# Altium PCB PCB3.PcbDoc
Units mil, origin at the board's own origin, x right, y up, seen from the top; angles counter-clockwise.
Board outline 10815 x 4595 mil, 2 copper layers (Top Layer, Bottom Layer); 72 components, 24 nets, 165 pads, 8 vias.
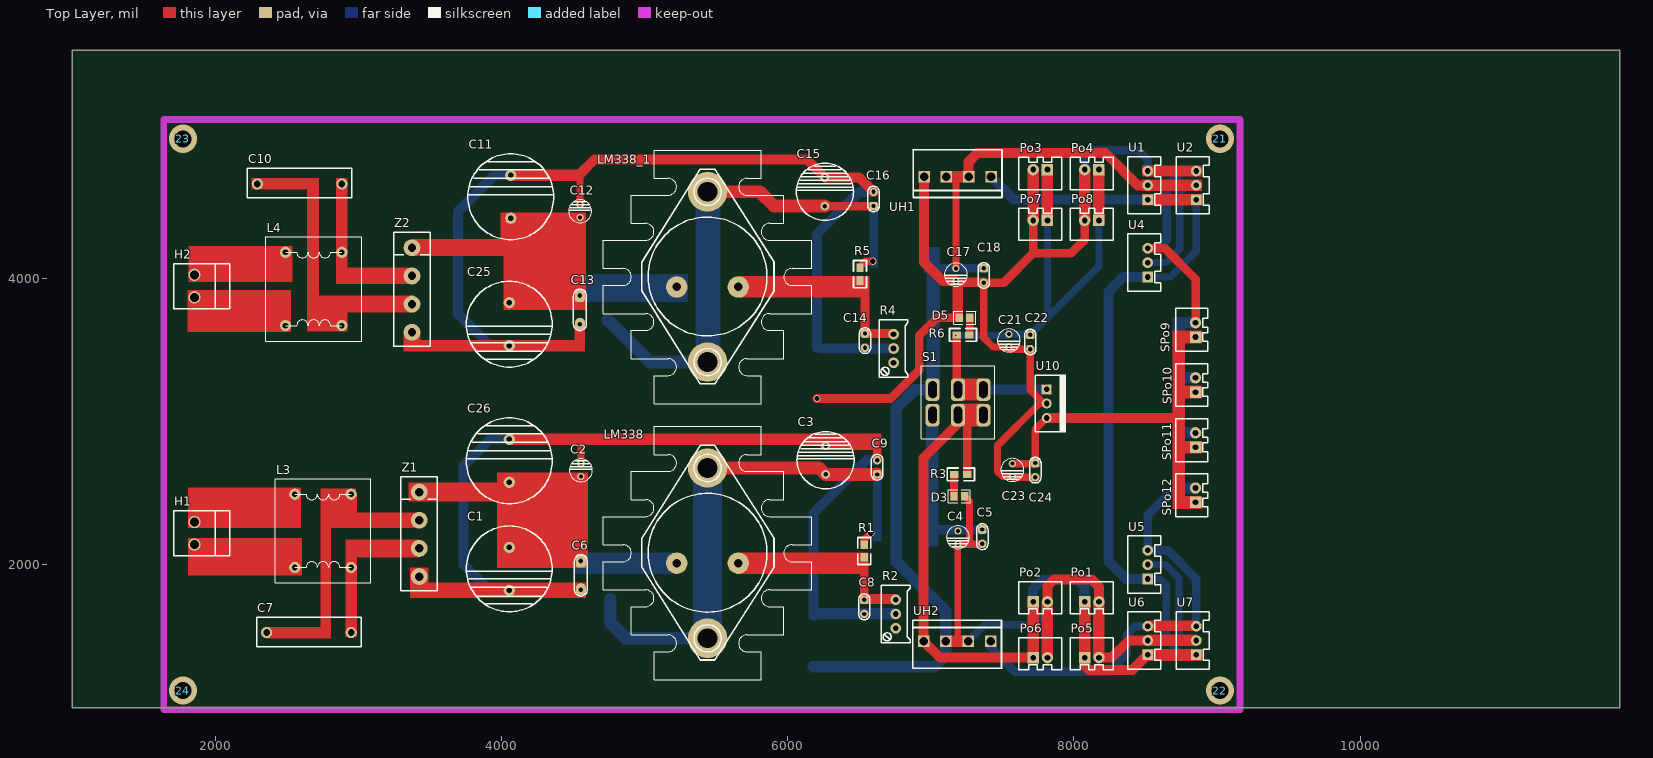
[diagram p0: Top Layer view]
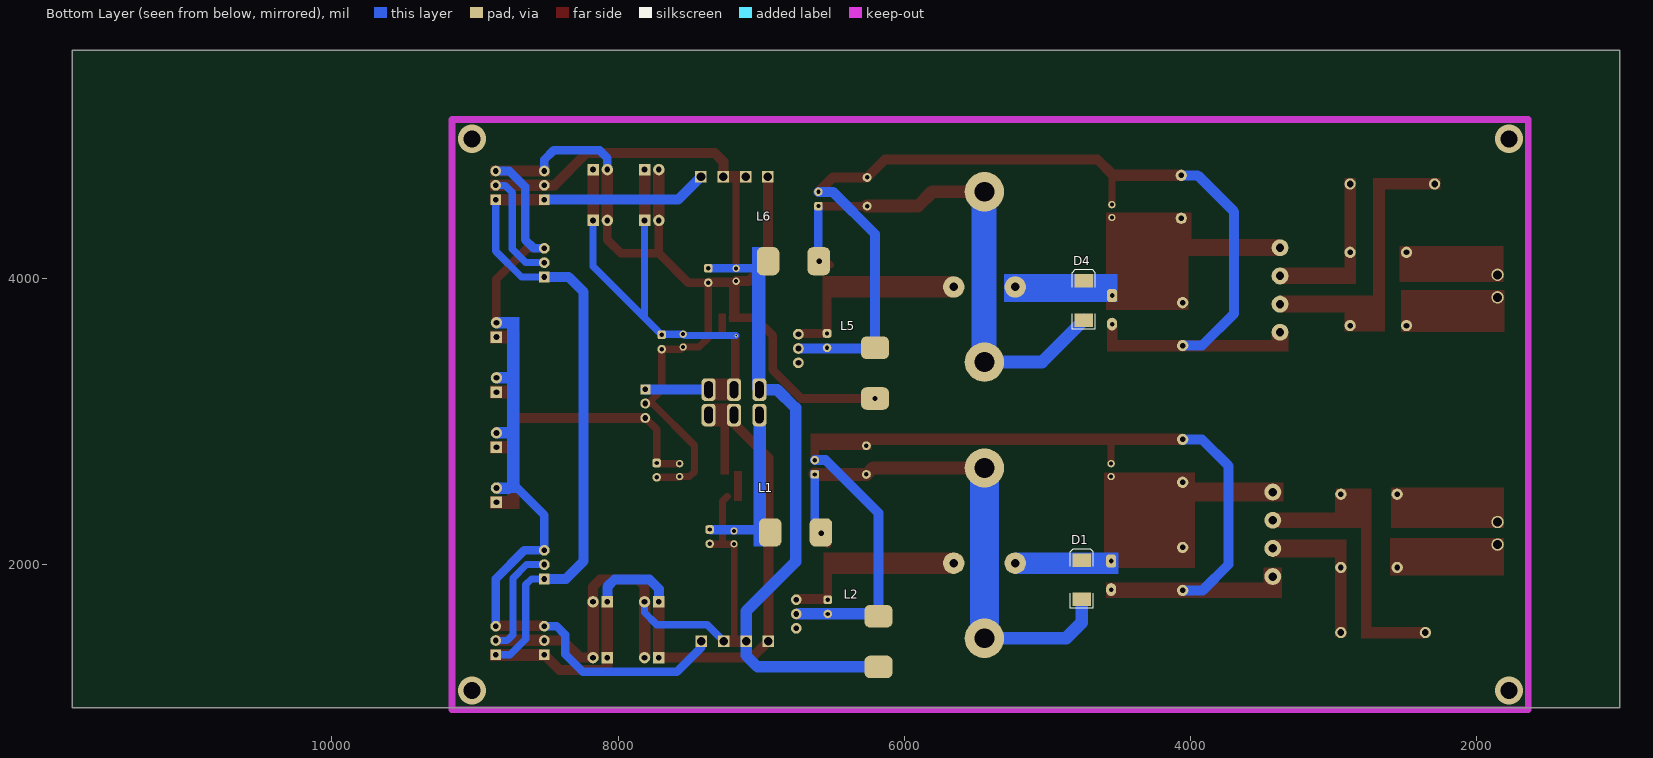
[diagram p1: Bottom Layer view, seen from below]

## Layer stack, top to bottom
Top Solder: solder mask 0.4, Solder Resist, Dk 3.5
Top Layer: signal copper 1.4
Dielectric 1: dielectric 12.6, FR-4, Dk 4.8
Bottom Layer: signal copper 1.4
Bottom Solder: solder mask 0.4, Solder Resist, Dk 3.5

## Board outline
1000,1000 11815,1000 11815,5595 1000,5595

## Design rules (kind name [scope] priority, off if disabled: settings)
Clearance [All] p1: gap=10
HoleSize [All] p1: absolutevalues=TRUE maxlimit=150 minlimit=1 maxpercent=80.000 minpercent=20.000
PolygonConnect [All] p1: connectstyle=Relief reliefconductorwidth=10 reliefentries=4 polygonreliefangle="90 Angle" airgapwidth=10
RoutingVias [All] p1: holewidth=28 width=50 viastyle="Through Hole" minholewidth=28 minwidth=50 maxholewidth=28 maxwidth=50
SolderMaskExpansion [All] p1: expansion=4
Width [All] p1: maxlimit=100 minlimit=10 preferedwidth=10
29 further rules are at their usual default settings.

## Components (designator, comment, footprint, x,y, rotation, side; value= is the part's Value field where it differs from the comment)
21 "螺丝孔" 固定过孔 9020,4975 r0 top
22 "螺丝孔" 固定过孔 9020,1120 r0 top
23 "螺丝孔" 固定过孔 1775,4975 r0 top
24 "螺丝孔" 固定过孔 1775,1120 r0 top
C1 "4700uF" CD-7.6mm 4055,2120 r90 top
C2 "Cap" CD-2.2mm 4555,2615 r270 top
C3 "470uF" CD-5mm 6265,2630 r270 top
C4 "22uF" CD-2.2mm 7190,2235 r90 top
C5 "10uF" 陶瓷电容 7360,2245 r90 top
C6 "0.1uF" 独石电容 4555,2025 r180 top
C7 "0.1uF" 安规电容 2359.45,1525 r270 top
C8 "Cap" 陶瓷电容 6535,1755 r90 top
C9 "Cap" 陶瓷电容 6625,2630 r270 top
C10 "Cap1" 安规电容 2294.45,4660 r270 top
C11 "4700uf" CD-7.6mm 4065,4420 r270 top
C12 "22uf" CD-2.2mm 4550,4425 r270 top
C13 "0.1uf" 独石电容 4548.29,3880 r180 top
C14 "Cap" 陶瓷电容 6540,3615 r90 top
C15 "470uf" CD-5mm 6260,4505 r270 top
C16 "0.1uf" 陶瓷电容 6600,4505 r270 top
C17 "22uf" CD-2.2mm 7175,4070 r90 top
C18 "10uf" 陶瓷电容 7370,4070 r90 top
C21 "22uf" CD-2.2mm 7545,3610 r90 top
C22 "Cap" 陶瓷电容 7695,3605 r90 top
C23 "22uf" CD-2.2mm 7570,2705 r90 top
C24 "Cap" 陶瓷电容 7730,2710 r90 top
C25 "4700uf" CD-7.6mm 4055,3830 r90 top
C26 "4700uf" CD-7.6mm 4055,2575 r270 top
D1 "Diode 1N4004" SMC 4760,1893.19 r90 bottom
D3 "LED" 0805_s 7220,2490 r0 top
D4 "1N4002" SMC 4745,3845 r90 bottom
D5 "LED" 0805_s 7215,3710 r180 top
H1 "HT3.96-2P" HT39.6-2P-S 1855,2140 r180 top
H2 "HT3.96-2P" HT39.6-2P-S 1855,3867.52 r180 top
L1 "Inductor Iron" "功率电感-12x12 - duplicate" 6760,2225 r0 bottom
L2 "Inductor Iron" "功率电感-12x12 - duplicate" 6180,1462.17 r270 bottom
L3 "扼流线圈" 扼流线圈 2556.3,2491.81 r0 top
L4 "扼流线圈" 扼流线圈 2491.3,4181.81 r0 top
L5 "SMD" "功率电感-12x12 - duplicate" 6205,3337.83 r270 bottom
L6 "SMD" "功率电感-12x12 - duplicate" 6775,4120 r0 bottom
LM338 "D1" LM338 5655,2010 r270 top
LM338_1 "" LM338 5655,3940 r270 top
Po1 "Power_2Port" Power_S_2Port 8075,1740 r0 top
Po2 "Power_2Port" Power_S_2Port 7715,1740 r0 top
Po3 "Power_2Port" Power_S_2Port 7815,4760 r180 top
Po4 "Power_2Port" Power_S_2Port 8175,4760 r180 top
Po5 "Power_2Port" Power_S_2Port 8075,1350 r0 top
Po6 "Power_2Port" Power_S_2Port 7715,1350 r0 top
Po7 "Power_2Port" Power_S_2Port 7815,4405 r180 top
Po8 "Power_2Port" Power_S_2Port 8175,4405 r180 top
R1 "Res2" 0805 6535,2050 r90 top
R2 "可调电位器1" 电位器 6755,1555 r90 top
R3 "1k" 0805 7165,2630 r0 top
R4 "可调电位器1" 电位器 6740,3410 r90 top
R5 "RES" 0805 6505,3985 r90 top
R6 "RES" 0805 7270,3605 r180 top
S1 "双掷开关" SWITCH 7367.17,3045 r180 top
SPo9 "Power_2Port" Power_S_2Port 8850,3590 r90 top
SPo10 "Power_2Port" Power_S_2Port 8850,3205 r90 top
SPo11 "Power_2Port" Power_S_2Port 8850,2820 r90 top
SPo12 "Power_2Port" Power_S_2Port 8850,2435 r90 top
U1 "XH2.54-3p" XH2.54-3p 8515,4550 r90 top
U2 "XH2.54-3p" XH2.54-3p 8855,4550 r90 top
U4 "XH2.54-3p" XH2.54-3p 8515,4010 r90 top
U5 "XH2.54-3p" XH2.54-3p 8515,1900 r90 top
U6 "XH2.54-3p" XH2.54-3p 8515,1370 r90 top
U7 "XH2.54-3p" XH2.54-3p 8855,1370 r90 top
U10 "LM2940" TO-220 7810,3225 r270 top
UH1 "VH3.96-4A" VH3.96-4P 7497.68,4564.33 r180 top
UH2 "VH3.96-4A" VH3.96-4P 6873.03,1610.67 r0 top
Z1 "整流桥" 整流桥 3425,2506.85 r0 top
Z2 "整流桥" 整流桥 3375,4213.7 r0 top

## Footprints (in the part's own frame and the unit in brackets; to place one, negate y for a bottom-side part, rotate by r counter-clockwise, add the part's x,y. Pads: shape width x height; smd on the part's side, far side on the other; paste and mask are expansions set on the pad)
0805 [mil]
  rect 60x50 smd: 1(0,0) 2(90,0)
  silkscreen extent -50,-45 140,45
0805_s [mm]
  rect 1.3x1.499 smd: 1(0.425,-0.35) 2(-1.475,-0.35)
  silkscreen extent -2.47,-1.49 1.43,0.79
CD-2.2mm [mm]
  round 1.3 hole 0.7: 1(0,0) 2(-2.286,0)
  silkscreen extent -3.16,-2.04 0.92,2.04
CD-5mm [mil]
  round 62 hole 31.5: 1(0,0) 2(-200,0)
  silkscreen extent -300,-200 100,200
CD-7.6mm [mm]
  round 2 hole 1: 1(0,0) 2(-7.62,0)
  silkscreen extent -11.43,-7.62 3.81,7.62
HT39.6-2P-S [mm]
  round 2.2 hole 1.6: 1(0,0) 2(0,-4)
  silkscreen extent -6.3,-6 3.7,2
LM338 [mm]
  round 3.81 hole 1.5: 1(0,0) 2(0,-10.922)
  round 7 hole 3.5: 3(-16.891,-5.461) 3(13.335,-5.461)
  silkscreen extent -24.28,-23.96 20.72,13.04, body extent -21.25,-18.03 17.55,6.97, height 8.8
Power_S_2Port [mil]
  rect 80x80 hole 40: 1(0,0)
  round 80 hole 40: 2(100,0)
  silkscreen extent -100,-85 200,140
SMC [mm] "DO-214-AB/SMC; 2 C-Bend Leads; Body 7.9 x 5.9 mm, inc. leads (LxW)"
  rect 2.4x3.3 smd: 1(-3.475,0) 2(3.475,0)
  silkscreen extent -5.07,-2.05 5.43,2.05
SWITCH [mm]
  rrect50% 2.5x4 hole 1.5 slot 3 at 90 deg: 1(0,0) 2(4.5,0) 3(9,0) 4(9,-4.5) 5(4.5,-4.5) 6(0,-4.5)
  silkscreen extent -2,-8.75 11,4.25, body extent -1.85,-8.18 10.85,3.63, height 30.58
TO-220 [mil]
  rect 70x70 hole 40: 1(0,0)
  round 70 hole 40: 2(100,0) 3(200,0)
  silkscreen extent -102,-80 302,135
VH3.96-4P [mil]
  rect 80x80 hole 60: 1(76.77,-145.67) 2(232.68,-145.67) 3(388.58,-145.67) 4(544.49,-145.67)
  silkscreen extent 0,-335 625,0
XH2.54-3p [mil]
  rect 75x75 hole 40: 1(0,0)
  round 75 hole 40: 2(100,0) 3(200,0)
  silkscreen extent -100,-90 300,140
"功率电感-12x12 - duplicate" [mm]
  rrect50% 4x5 smd: 1(-4.5,0) 2(4.5,0)
  body extent -6.08,-6.15 6.21,6.15, height 8
固定过孔 [mil]
安规电容 [mm]
  round 2 hole 1.2: 1(0,0) 2(0,15)
  silkscreen extent -2.75,-1.75 2.5,16.75, body extent -2.75,-1.75 2.6,16.75, height 13
扼流线圈 [mm]
  round 2 hole 1: 1(0,0) 2(10,0) 3(10,-13) 4(0,-13)
  silkscreen extent -3.5,-15.75 13.5,2.75
整流桥 [mm]
  round 3 hole 1.5: 1(0,0) 2(0,-5) 3(0,-10) 4(0,-15)
  silkscreen extent -3.25,-17.5 3.25,2.75
独石电容 [mil]
  rrect50% 70x90 hole 32: 1(0,0)
  oval 70x90 hole 32: 2(0,200)
  silkscreen extent -45,-45 45,245, body extent -77,-18 73,218, height 335
电位器 [mil]
  round 75 hole 40: 1(0,0) 2(100,0) 3(200,0)
  silkscreen extent -100,-100 300,100
陶瓷电容 [mil]
  rrect50% 60x60 hole 30: 1(0,0)
  round 60 hole 30: 2(-100,0)
  silkscreen extent -140,-40 40,40, body extent -158,-49 59,49, height 217

## Part data
C1 C3 C4 C5 C6 C7 C11 C12 C13 C15 C16 C17 C18 C21 C23 C25 C26: library part Cap
C8 C9 C22 C24: library part Cap_1
D1: "1 Amp General Purpose Rectifier"
D4: library part Diode, "Default Diode"
L1 L2: "Magnetic-Core Inductor"
L5 L6: library part 功率电感
LM338 LM338_1: library part LM338
R1: "Resistor"
R3: library part RES, "1K"

## Via types
v1: diameter 196.85, hole 118.11, Top Layer to Bottom Layer, 4 vias
v2: diameter 50, hole 38, Top Layer to Bottom Layer, 3 vias
v3: diameter 24, hole 12, Top Layer to Bottom Layer, 1 vias

## Nets (pads, with @x,y where several pads share a name; then routed paths per layer and width w, separated by ;. In a path a pad name is that pad's centre, name@x,y a point inside that pad or via, vN(x,y) a via of type N, cw(c..) or ccw(c..) an arc to the next point about the centre after c; other vN are vias at no path point)
NetC1_1: C1.1 C2.1 C6.1 C26.1 D1.2 LM338.2 Z1.1
NetC1_2: C1.2 C2.2 C3.2 C6.2 C8.2 C9.2 C26.2 L2.1 R2.2 Z1.4 | length 2800.1
  Bottom Layer w70: C1.2 3915,1820 3735,2000 3735,2690 3920,2875 C26.2 ; L2.1 6180,2360 6550,2730 C9.2
NetC3_1: C3.1 C9.1 D1.1 L1.1 LM338.3 R1.2 | length 2194.2
  Top Layer w50: R1.2 6535,2175 v2(6580,2220)
  Top Layer w90: LM338.3@5440,2675 6220,2675 C3.1 C9.1 C9.1@6625,2635
  Bottom Layer w90: D1.1 4760,1595 4870,1485 LM338.3@5440,1485
NetC4_1: C4.1 C5.1 L1.2 S1.3
NetC4_2: C4.2 C5.2 C17.1 C18.1 D3.1 L2.2 L6.2 Po1.2 Po2.2 Po5.2 Po6.2 S1.4 U1.2 U2.2 U4.2 U5.2 U6.2 U7.2 UH1.2 UH1.3 UH2.2 UH2.3 | length 8261.5
  Top Layer w50: D3.1 7270,2442.95 7270,2140
  Top Layer w70: UH1.2 7265,4815 7325,4875 8220,4875 8445,4650 U1.2 ; Po2.2 7815,1850 7860,1895 8125,1895 8175,1845 Po1.2 ; Po5.2 8265,1350 8385,1470 U6.2
  Bottom Layer w50: UH2.3 7376.61,1580 7730,1580 7815,1665 Po2.2 ; U5.2 8640,2000 8735,1905 8735,1510 8775,1470 U7.2 ; U4.2 8645,4110 8740,4205 8740,4600 8790,4650 U2.2
  Bottom Layer w80: L2.2 7025,1285 7105.71,1365.71 UH2.2 7105.71,1674.29 6760,2020 6760,3095 6887.17,3222.17 S1.4
NetC7_1: C7.1 L3.2 Z1.2
NetC7_2: C7.2 L3.3 Z1.3
NetC8_1: C8.1 LM338.1 R1.1 R2.3
NetC10_1: C10.1 L4.3 Z2.3
NetC10_2: C10.2 L4.2 Z2.2
NetC11_1: C11.1 C12.1 C13.1 C25.1 D4.2 LM338_1.2 Z2.1
NetC11_2: C11.2 C12.2 C13.2 C14.2 C15.2 C16.2 C25.2 L5.1 R4.2 Z2.4 | length 5149.8
  Top Layer w70: 4540,4720 4650,4830 6135,4830 C15.2 6500,4705 C16.2
  Bottom Layer w70: C25.2 3920,3530 3695,3755 3695,4465 3950,4720 C11.2 ; L5.1 6205,4310 6500,4605 C16.2
NetC14_1: C14.1 LM338_1.1 R4.3 R5.1
NetC15_1: C15.1 C16.1 D4.1 L6.1 LM338_1.3 R5.2 | length 1766.8
  Top Layer w50: R5.2@6517.5,4092.5 6545,4120 v2(6595,4120)
  Top Layer w90: LM338_1.3@5440,4605 5805,4605 5905,4505 C15.1
  Bottom Layer w90: D4.1 5038.19,3415 LM338_1.3@5440,3415
NetC17_2: C17.2 C18.2 C21.2 C22.2 C23.2 C24.2 D5.1 L5.2 Po3.2 Po4.2 Po7.2 Po8.2 SPo9.2 SPo10.2 SPo11.2 SPo12.2 U1.3 U2.3 U4.3 U5.3 U6.3 U7.3 U10.2 UH1.4 UH2.4 | length 10521
  Top Layer w50: C18.2 7370,3585 7435,3520 C21.2 7560,3505 C22.2 7695,3220 U10.2@7790,3125 ; C24.2 7575,2610 C23.2 7500,2615 7465,2650 7465,2830 7760,3125 U10.2@7790,3125 ; U10.2 U10.2@7790,3125
  Top Layer w60: v2(6205,3160.67) 6720.67,3160.67 6920,3360 6920,3600 7043.78,3723.78 D5.1 ; C18.2 7510,3970 7715,4175 ; Po7.2 7715,4175 ; Po8.2 8075,4270 7980,4175 7715,4175 ; U4.3 8635,4210 8850,3995 SPo9.2
  Top Layer w70: UH1.4 6953.19,4111.81 7085,3980 C17.2
  Bottom Layer w60: UH2.4 7417.52,1422.48 7590,1250 8245,1250 8370,1375 8370,1510 8430,1570 U6.3 ; Po4.2 8075,4840 8130,4895 8450,4895 8515,4830 U1.3 ; U4.3 8590,4210 8650,4270 8650,4640 8760,4750 U2.3 ; SPo12.2 8705,2535 8515,2345 U5.3 8655,2100 8855,1900 U7.3
NetC21_1: C21.1 C22.1 Po3.1 Po4.1 Po7.1 Po8.1 R6.2 S1.5 S1.6 U10.1 | length 2649
  Bottom Layer w50: v3(7175,3600) 7535,3600 C21.1 7690,3610 C22.1 7815,3725 ; S1.6 S1.6@7370,3225 ; Po7.1 7815,3725 ; Po8.1 8175,4085 7815,3725
  Bottom Layer w70: S1.6@7370,3225 U10.1
NetC23_1: C23.1 C24.1 SPo9.1 SPo10.1 SPo11.1 SPo12.1 U10.3 | length 510.2
  Top Layer w50: C23.1 7725,2705 C24.1 7730,2945 U10.3
NetD3_2: D3.2 R3.1
NetD5_2: D5.2 R6.1
NetH1_1: H1.1 L3.4
NetH1_2: H1.2 L3.1
NetH2_1: H2.1 L4.4
NetH2_2: H2.2 L4.1
NetPo1_1: Po1.1 Po2.1 Po5.1 Po6.1 R3.2 S1.1 S1.2 U1.1 U2.1 U4.1 U5.1 U6.1 U7.1 UH1.1 UH2.1 | length 8888.2
  Top Layer w70: S1.2 7190,2985 6949.8,2744.8 UH2.1 7064.8,1350 Po6.1 ; Po5.1 8075,1295 8105,1265 8410,1265 U6.1
  Bottom Layer w50: U5.1 8605,1900 8645,1860 8645,1480 8755,1370 U7.1 ; U4.1 8675,4010 8855,4190 U2.1
  Bottom Layer w70: UH1.1 7580.91,4550 U1.1 ; Po2.1 7715,1830 7780,1895 8025,1895 8075,1845 Po1.1 ; U5.1 8365,1900 8240,2025 8240,3905 8345,4010 U4.1
pads on no net: R2.1 R4.1
copper on no net:
  other v1: 1775,1120 9020,1120 1775,4975 9020,4975

## Keep-outs
Keep-Out Layer:
  lines w47.24: 1640,985 9160,985 9160,5110 1640,5110 1640,985

## Other copper
Top Layer:
  rectangle net NetC11_1: 3995,4325 4120,4460
  rectangle net NetC23_1: 7810,2990 8745,3060
  rectangle net NetC23_1: 8745,3545 8895,3635
  rectangle net NetC23_1: 8735,3160 8895,3250
  rectangle net NetC23_1: 8750,2775 8895,2865
  rectangle net NetC23_1: 8725,2390 8895,2480
  rectangle net NetC23_1: 8690,2390 8775,3635
  rectangle net NetC4_2: 7150,4070 7200,4700
  rectangle net NetC21_1: 7150,3210 7210,3595
  rectangle net NetH2_2: 1815,3975 2540,4225
  rectangle net NetH2_1: 1805,3625 2530,3920
  rectangle net NetH1_2: 1810,2255 2600,2540
  rectangle net NetH1_1: 1810,1925 2605,2185
  rectangle net NetC1_1: 3970,1975 4140,2645
  rectangle net NetC1_1: 4140,1975 4605,2115
  rectangle net NetC1_1: 4510,2115 4605,2645
  rectangle net NetC1_1: 4130,2095 4510,2645
  rectangle net NetC1_1: 3350,2440 4000,2575
  rectangle net NetC1_2: 3360,1765 4590,1875
  rectangle net NetC1_2: 3360,1855 3490,1980
  rectangle net NetC7_2: 2910,2050 3425,2175
  rectangle net NetC7_2: 2910,1495 2990,2100
  rectangle net NetC7_1: 2910,2255 3425,2365
  rectangle net NetC7_1: 2910,2350 2990,2490
  rectangle net NetC10_2: 2845,3960 3370,4075
  rectangle net NetC10_2: 2845,3960 2925,4185
  rectangle net NetC10_1: 2845,3670 2925,3880
  rectangle net NetC10_1: 2920,3760 3375,3880
  rectangle net NetC10_2: 2845,4620 2920,4700
  rectangle net NetC10_2: 2845,4180 2925,4700
  rectangle net NetC11_1: 3375,4155 4095,4275
  rectangle net NetC11_1: 4015,3780 4095,4275
  rectangle net NetC11_1: 4095,3780 4590,4460
  rectangle net NetC11_2: 3315,3490 4575,3570
  rectangle net NetC11_2: 3315,3505 3435,3625
  rectangle net NetC11_2: 4510,3490 4585,3685
  rectangle net NetC11_1: 3995,4210 4115,4325
  rectangle net NetC1_2: 4530,2705 4580,2900
  rectangle net NetC1_2: 4055,2835 6655,2915
  rectangle net NetC11_2: 4050,4680 4570,4760
  rectangle net NetC11_2: 4525,4490 4575,4760
  rectangle net NetC15_1: 6240,4475 6600,4535
  rectangle net NetC7_1: 2360,1485 2810,1565
  rectangle net NetC7_1: 2735,1485 2810,2530
  rectangle net NetC7_1: 2810,2255 2985,2530
  rectangle net NetC10_1: 2255,4620 2725,4700
  rectangle net NetC10_1: 2640,3630 2725,4700
  rectangle net NetC10_1: 2640,3630 2925,3880
  rectangle net NetC1_2: 6235,2800 6295,2860
  rectangle net NetC1_2: 6230,2800 6655,2860
  rectangle net NetC1_2: 6595,2740 6655,2840
  rectangle net NetC17_2: 7675,4400 7755,4760
  rectangle net NetC17_2: 8035,4400 8115,4760
  rectangle net NetC21_1: 7775,4400 7855,4765
  rectangle net NetC21_1: 8135,4390 8215,4760
  rectangle net NetC17_2: 8475,4710 8890,4790
  rectangle net NetC4_2: 8475,4610 8895,4690
  rectangle net NetPo1_1: 8475,4510 8895,4590
  rectangle net NetPo1_1: 7675,1360 7755,1760
  rectangle net NetC4_2: 7775,1350 7855,1740
  rectangle net NetPo1_1: 8035,1350 8115,1740
  rectangle net NetC4_2: 8135,1350 8215,1740
  rectangle net NetPo1_1: 8475,1325 8895,1410
  rectangle net NetC17_2: 8515,1535 8860,1610
  rectangle net NetC4_2: 8515,1430 8855,1510
  rectangle net NetC14_1: 5655,3865 6570,4015
  rectangle net NetC14_1: 6510,3610 6570,3905
  rectangle net NetC4_2: 7070,4670 7305,4750
  rectangle net NetC4_2: 7065,1425 7300,1505
  rectangle net NetC14_1: 6540,3585 6740,3645
  rectangle net NetC8_1: 6505,1735 6565,2045
  rectangle net NetC8_1: 6510,1725 6755,1795
  rectangle net NetC8_1: 5655,1935 6565,2085
  region net NetD5_2: 7300,3755 7245,3755 7245,3590 7300,3590
  rectangle net NetD3_2: 7135,2445 7190,2655
  rectangle net NetC21_1: 7195,3145 7375,3300
  rectangle net NetPo1_1: 7185,2965 7375,3125
  rectangle net NetC17_2: 7175,3940 7375,4005
  rectangle net NetC4_2: 7190,2115 7360,2170
  rectangle net NetC17_2: 7150,3695 7225,3980
  rectangle net NetPo1_1: 7225,2630 7285,3045
  rectangle net NetC4_2: 7165,1480 7210,2145
Bottom Layer:
  rectangle net NetC17_2: 8730,2880 8850,2960
  rectangle net NetC17_2: 8735,3265 8850,3345
  rectangle net NetC17_2: 8690,2500 8775,3730
  rectangle net NetC17_2: 8690,3650 8850,3730
  rectangle net NetC17_2: 8750,2495 8850,2575
  rectangle net NetC11_1: 4510,3835 5305,4030
  rectangle net NetC1_1: 4505,1935 5225,2085
  rectangle net NetC15_1: 5355,3425 5530,4620
  rectangle net NetC3_1: 5340,1475 5540,2665
  rectangle net NetC3_1: 6595,2160 6655,2660
  rectangle net NetC11_2: 6225,3475 6740,3545
  rectangle net NetC1_2: 6200,1615 6755,1695
  rectangle net NetC15_1: 6570,4075 6630,4505
  rectangle net NetC4_1: 6960,2210 7360,2275
  rectangle net NetC4_2: 6950,4040 7365,4100
  rectangle net NetC4_1: 6965,2125 7055,3050
  rectangle net NetC4_2: 6970,3215 7065,4220